# EAGLE board Board (EAGLE 9.6.2)
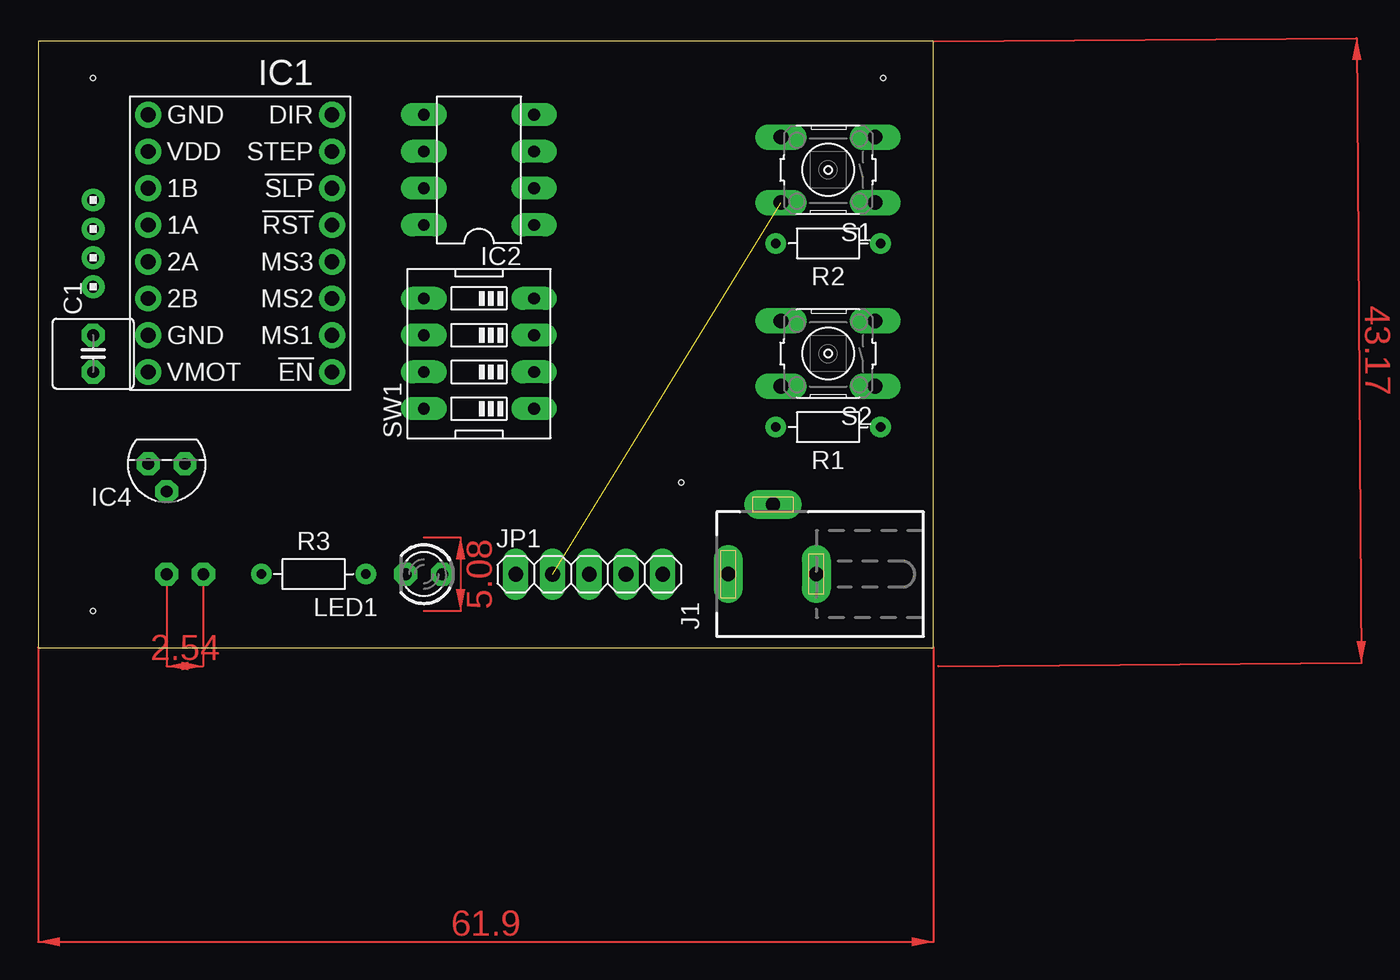
[diagram p0: board, top side]
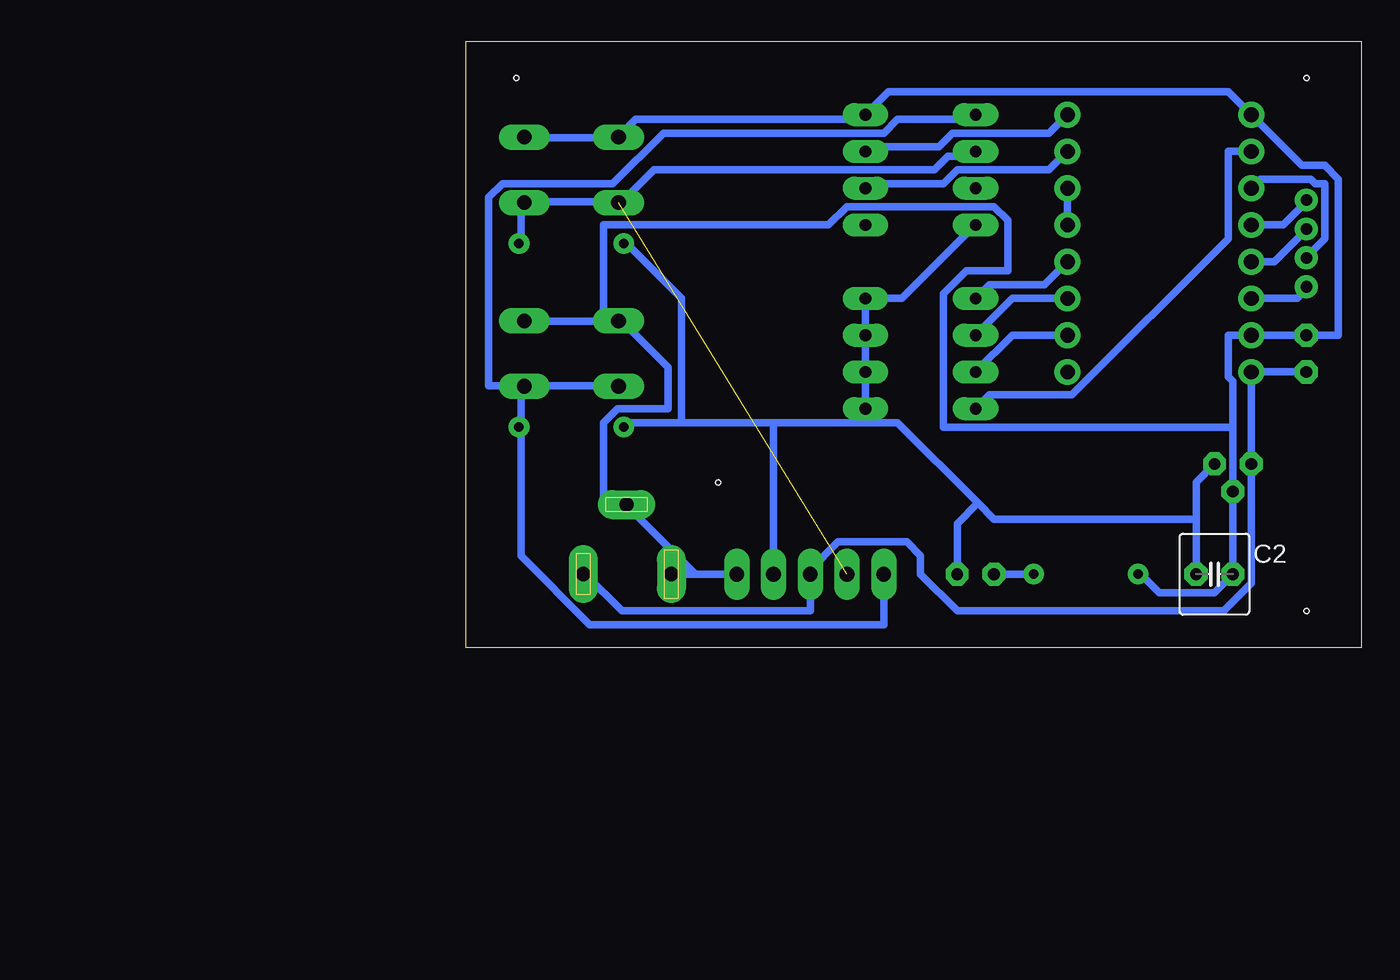
[diagram p1: board, bottom side, seen from below]

Size 61.9 x 41.9 mm. Coordinates in mm from the lower left corner, seen from the top.
Outline: 0,0 61.9,0 61.9,41.9 0,41.9 0,0
Copper layers (1*16): Top 0.035mm / dielectric 1.5mm / Bottom 0.035mm
Design rules "default *": minimum track width 20mil, minimum drill 0.35mm, track to track 15mil, track to pad 6mil, pad to pad 6mil, via to via 6mil, smd to smd 6mil, copper to edge 40mil, drill to drill 6mil, minimum pad ring 15mil, minimum via ring 8mil, stop-mask expansion 4mil, vias tented up to drill 0mil, thermal gap 10mil
Holes 0.35 mm at 44.45,11.43 3.81,2.54 3.81,39.37 58.42,39.37

## Footprints (pad centres in the part's own frame; a part is rotated, then mirrored left to right if it is on the bottom)
C2.5-6 = drill 0.813 pad 1.6 octagon: 1 -1.27,0; 2 1.27,0
A4988 = drill 1.016: 1 -6.35,8.89; 2 -6.35,6.35; 3 -6.35,3.81; 4 -6.35,1.27; 5 -6.35,-1.27; 6 -6.35,-3.81; 7 -6.35,-6.35; 8 -6.35,-8.89; 9 6.35,-8.89; 10 6.35,-6.35; 11 6.35,-3.81; 12 6.35,-1.27; 13 6.35,1.27; 14 6.35,3.81; 15 6.35,6.35; 16 6.35,8.89
DIL08 = drill 0.813 long: 1 -3.81,-3.81; 2 -1.27,-3.81; 3 1.27,-3.81; 4 3.81,-3.81; 5 3.81,3.81; 6 1.27,3.81; 7 -1.27,3.81; 8 -3.81,3.81
TO92 = drill 0.813 octagon: 1 -1.27,0; 2 0,1.905; 3 1.27,0
DCJ0202 = drill 1 pad 2 long: 1 0,3.1; 2 4.8,0; 3 0,-3
1X05 = drill 1.016 long: 1 -5.08,0; 2 -2.54,0; 3 0,0; 4 2.54,0; 5 5.08,0
LED3MM = drill 0.813 octagon: A -1.27,0; K 1.27,0
RESAD724W46L381D178B = drill 0.66 pad 1.26: 1 -3.62,0; 2 3.62,0
B3F-10XX = drill 1.016 long: 1 -3.251,2.261; 2 3.251,2.261; 3 -3.251,-2.261; 4 3.251,-2.261
EDG-04 = drill 0.813 long: 1 -3.81,-3.81; 2 -1.27,-3.81; 3 1.27,-3.81; 4 3.81,-3.81; 5 3.81,3.81; 6 1.27,3.81; 7 -1.27,3.81; 8 -3.81,3.81
1X4 = drill 0.8 pad 1.422: 1 -3,0; 2 -1,0; 3 1,0; 4 3,0

## Placement (x,y rotation side)
C1  [C2.5-6]  3.81,20.32 90 top
C2  [C2.5-6]  10.16,5.08 0 bottom
IC1  2128-A4988  [A4988]  13.97,27.94 180 top
IC2  ATTINY13-20PU  [DIL08]  30.48,33.02 90 top
IC4  78L05Z  [TO92]  8.89,12.7 180 top
J1  DCJ0202  [DCJ0202]  50.8,5.08 90 top
JP1  [1X05]  38.1,5.08 0 top
LED1  TLLG4400  [LED3MM]  26.67,5.08 180 top
R1  [RESAD724W46L381D178B]  54.61,15.24 180 top
R2  [RESAD724W46L381D178B]  54.61,27.94 180 top
R3  [RESAD724W46L381D178B]  19.05,5.08 0 top
S1  [B3F-10XX]  54.61,33.02 180 top
S2  [B3F-10XX]  54.61,20.32 180 top
SW1  [EDG-04]  30.48,20.32 90 top
U$1  1X4  [1X4]  3.81,27.94 270 top

## Library data of the parts
C1 C2 = capacitor-wima
IC1 = pololu-stepper-driver
IC2 = attiny13
IC4 = linear
J1 = con-jack; OC_FARNELL: unknown; OC_NEWARK: unknown
JP1 = pinhead
LED1 = led; MF: VISHAY SEMICONDUCTOR; OC_FARNELL: 1612435
R1-R3 = Resistor; CATEGORY: Resistor; SUB-CATEGORY: Fixed
S1 S2 = switch-omron; MPN: B3F-1000; OC_FARNELL: 176432; OC_NEWARK: 36M3542
SW1 = special
U$1 = headers(2mm)

## Nets
1A: IC1.12 U$1.1
1B: IC1.11 U$1.3
2A: IC1.13 U$1.2
2B: IC1.14 U$1.4
12V: C1.1 IC1.16 IC4.3 J1.3 JP1.3
DIR: IC1.8 IC2.3
GND: C1.2 C2.2 IC1.9 IC1.15 IC2.4 IC4.2 J1.1 J1.2 JP1.5 R3.1 S1.3 S1.4 S2.3 S2.4
MS1: IC1.2 SW1.7
MS2: IC1.3 SW1.6
MS3: IC1.4 SW1.5
N$7: LED1.K R3.2
N$8: IC2.5 JP1.1 R1.1 S2.1 S2.2
N$10: IC1.5 IC1.6
PB1: IC2.6 JP1.2 R2.1 S1.1 S1.2
STEP: IC1.7 IC2.2
VCC: C2.1 IC2.8 IC4.1 JP1.4 LED1.A R1.2 R2.2 SW1.1 SW1.2 SW1.3 SW1.4
VDDD: IC1.10 SW1.8

## Tracks (layer width: path | path; a pad name or v marks a point on that pad's centre or on a via)
1A
  Bottom 0.508: IC1.12 5.4,29.21 3.81,30.8 U$1.1
1B
  Bottom 0.508: IC1.11 6.99,32.38 3.49,32.38 3.18,32.07 2.54,32.07 2.54,28.26 3.81,26.99 U$1.3
2A
  Bottom 0.508: IC1.13 6.03,26.67 3.81,28.89 U$1.2
2B
  Bottom 0.508: IC1.14 4.45,24.13 3.81,24.77 U$1.4
12V
  Bottom 0.508: C1.1 IC1.16 IC4.3 7.62,4.45 9.53,2.54 27.94,2.54 30.48,5.08 30.48,6.35 31.43,7.3 36.2,7.3 38.1,5.4 JP1.3 38.1,2.54 51.12,2.54 53.66,5.08 J1.3
DIR
  Bottom 0.508: IC2.3 33.97,34.61 29.21,34.61 28.26,35.56 21.59,35.56 IC1.8
GND
  Bottom 0.508: 52.39,22.54 57.78,22.54 S2.3 | 52.39,22.54 51.43,22.54 S2.4 | J1.1 46.04,5.08 | 46.04,5.08 JP1.5 | 46.04,5.08 50.8,9.84 J1.2 50.8,10.16 52.39,10.16 52.39,15.56 51.43,16.51 47.94,16.51 47.94,19.37 51.12,22.54 S2.4 | S1.3 57.78,35.24 51.43,35.24 S1.4 51.12,35.56 50.16,36.51 34.61,36.51 IC2.4 32.7,38.42 9.21,38.42 IC1.9 4.13,33.34 2.54,33.34 1.59,32.38 1.59,21.59 C1.2 IC1.15 9.21,21.59 9.21,18.73 8.89,18.41 8.89,15.24 | R3.1 15.24,5.08 13.97,3.81 10.16,3.81 C2.2 IC4.2 8.89,15.24 | 52.39,22.54 52.39,29.21 36.83,29.21 35.56,30.48 25.4,30.48 24.45,29.53 24.45,26.04 27.3,26.04 28.89,24.45 28.89,15.24 8.89,15.24 | 52.39,22.54 S2.4
MS1
  Bottom 0.508: SW1.7 24.13,21.59 IC1.2
MS2
  Bottom 0.508: SW1.6 24.13,24.13 IC1.3
MS3
  Bottom 0.508: SW1.5 25.72,25.08 21.91,25.08 IC1.4
N$7
  Bottom 0.508: LED1.K R3.2
N$8
  Bottom 0.508: 58.1,15.24 58.1,17.78 S2.1 | IC2.5 26.99,36.51 32.07,36.51 33.02,35.56 48.26,35.56 51.75,32.07 59.37,32.07 60.32,31.11 60.32,18.1 58.1,18.1 S2.1 | JP1.1 33.02,1.59 53.34,1.59 58.1,6.35 58.1,15.24 | 58.1,15.24 R1.1 | S2.2 51.43,18.1 57.78,18.1 S2.1
N$10
  Bottom 0.508: IC1.6 IC1.5
PB1  (1 unrouted)
  Bottom 0.508: R2.1 58.1,27.94 58.1,30.48 S1.1 57.78,30.8 51.43,30.8 S1.2 51.12,30.8 48.89,33.02 29.53,33.02 28.57,33.97 26.99,33.97 IC2.6
STEP
  Bottom 0.508: IC2.2 33.97,32.07 28.89,32.07 27.94,33.02 21.59,33.02 IC1.7
VCC
  Bottom 0.508: IC2.8 31.75,24.13 SW1.4 SW1.3 SW1.2 SW1.1 35.24,15.56 | 35.24,15.56 40.64,15.56 | 35.24,15.56 32.07,15.56 26.51,10 | 40.64,15.56 46.99,15.56 | 46.99,15.56 50.48,15.56 50.8,15.24 R1.2 | 46.99,15.56 46.99,24.13 50.8,27.94 R2.2 | LED1.A 27.94,8.57 26.51,10 | 40.64,15.56 JP1.4 | 11.43,8.89 25.4,8.89 26.51,10 | IC4.1 11.43,11.43 11.43,8.89 | C2.1 11.43,8.89
VDDD
  Bottom 0.508: SW1.8 25.72,17.46 20,17.46 9.21,28.26 9.21,34.29 IC1.10
(copper drawn outside any net)
  shapes: Top area x4